# Altium PCB ZX_UNO_0_15.PcbDoc
Units mil, origin at the board's own origin, x right, y up, seen from the top; angles counter-clockwise.
Board outline 3395.53 x 2214.53 mil, 2 copper layers (Top Layer, Bottom Layer); 98 components, 140 nets, 511 pads, 131 vias.
Unrouted connection lines stored in the file: 2.
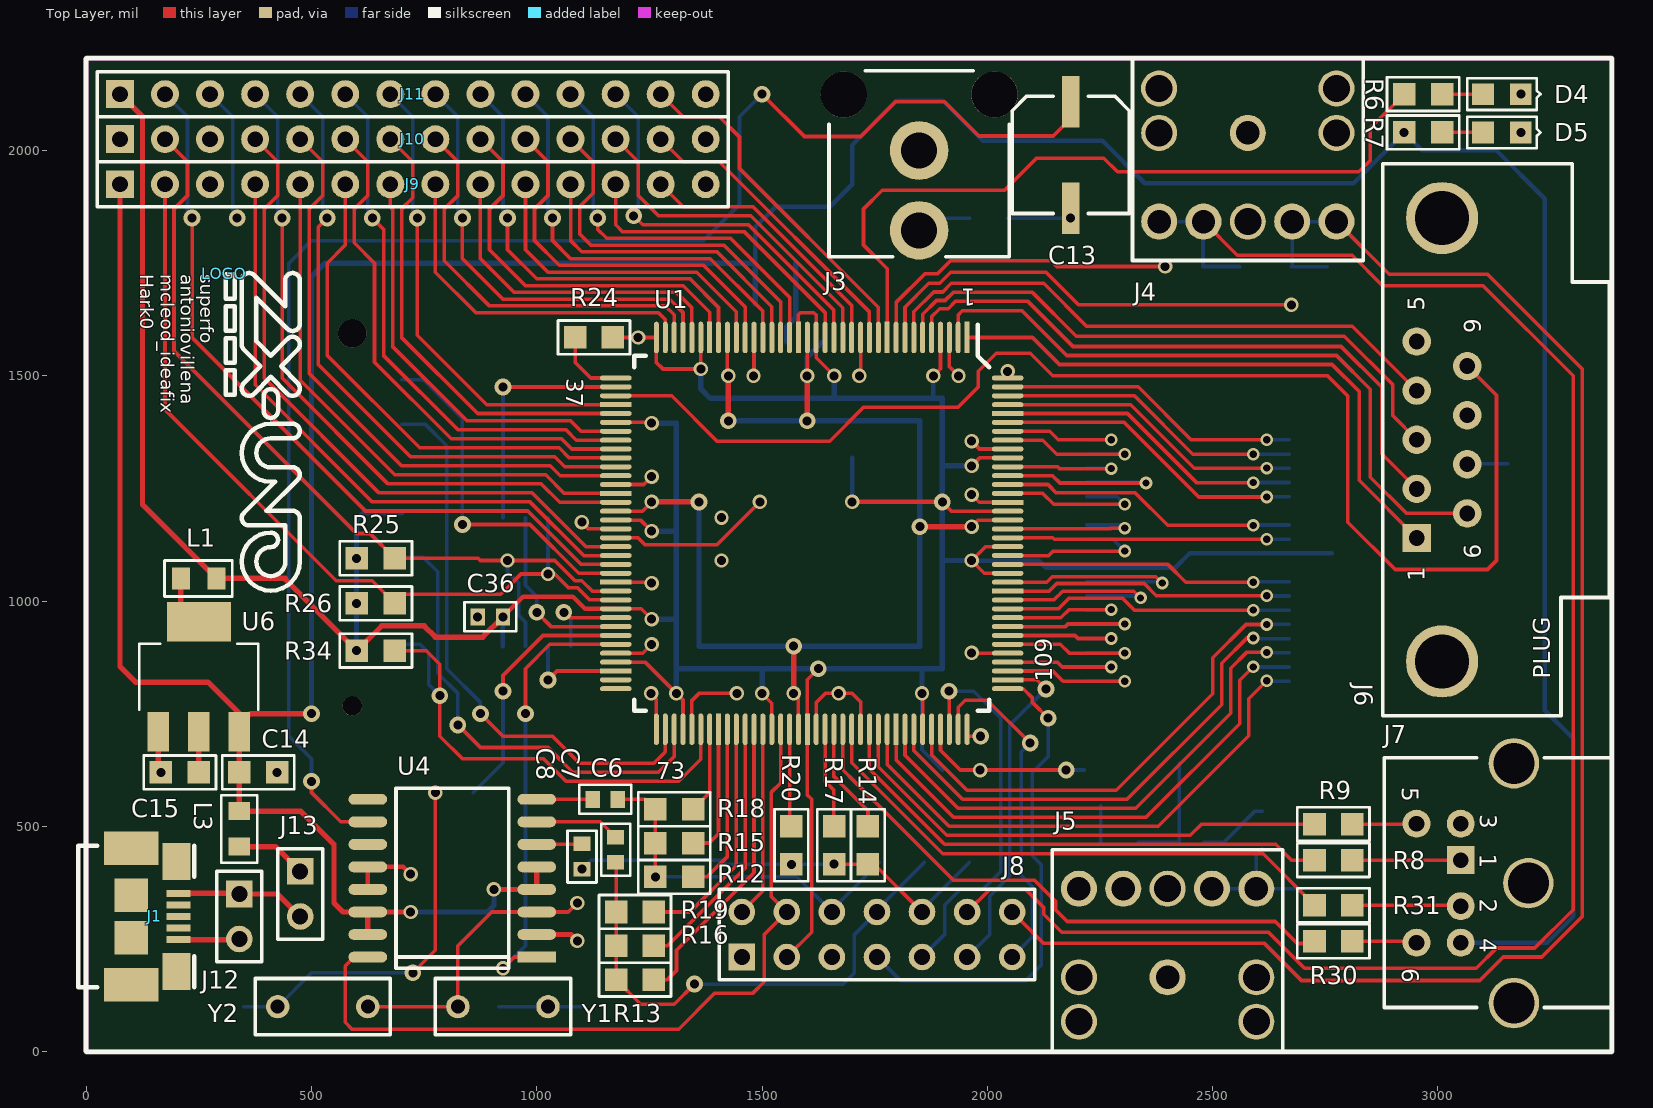
[diagram p0: Top Layer view]
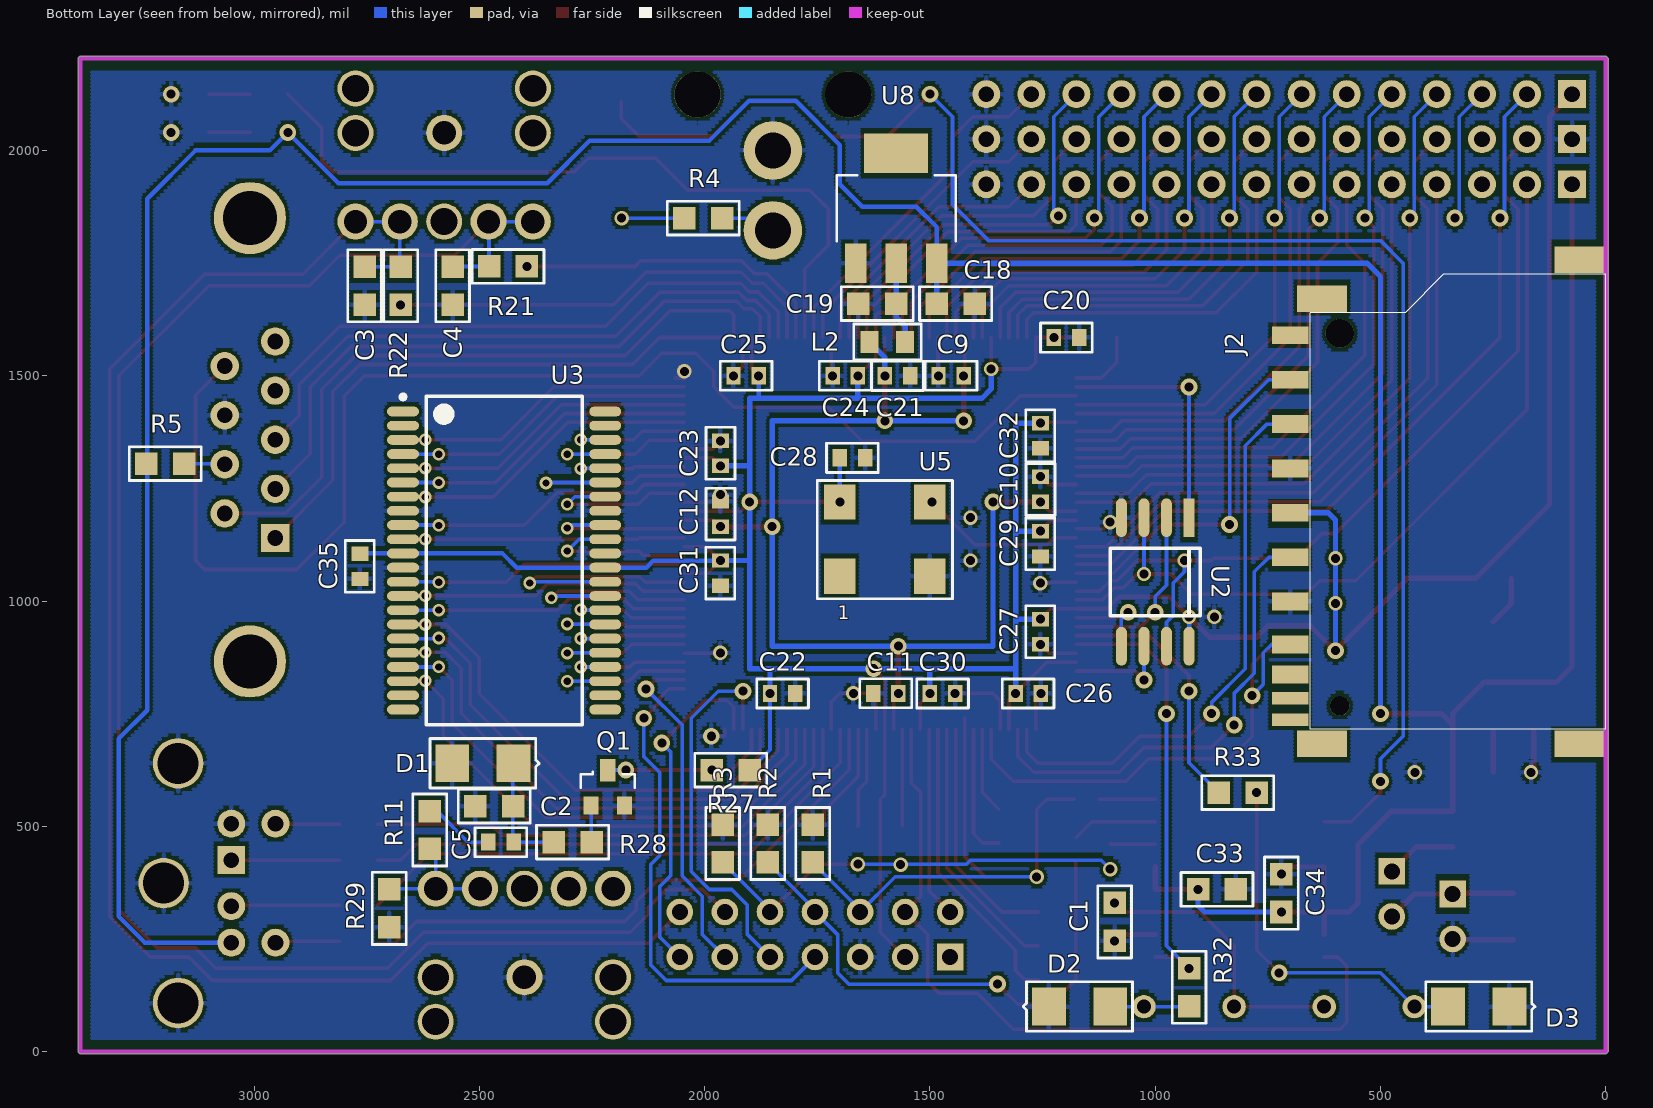
[diagram p1: Bottom Layer view, seen from below]

## Layer stack, top to bottom
Top Solder: solder mask 0.4, Solder Resist, Dk 3.5
Top Layer: signal copper 1.4
Dielectric1: core 12.6, FR-4, Dk 4.8
Bottom Layer: signal copper 1.4
Bottom Solder: solder mask 0.4, Solder Resist, Dk 3.5

## Board outline
-5,0 0,-5 3385.53,-5 3390.53,0 3390.53,2204.53 3385.53,2209.53 0,2209.53 -5,2204.53

## Design rules (kind name [scope] priority, off if disabled: settings)
Clearance [All] p1: gap=7
HoleSize [All] p1: absolutevalues=TRUE maxlimit=200 minlimit=1 maxpercent=80.000 minpercent=20.000
MinimumSolderMaskSliver [All] p1: minsoldermaskwidth=8
PlaneConnect [All] p1: planeconnectstyle=Relief reliefexpansion=25 reliefentries=4 reliefconductorwidth=12 reliefairgap=10
PolygonConnect [All] p1: connectstyle=Relief reliefconductorwidth=10 reliefentries=4 polygonreliefangle="90 Angle" airgapwidth=10
RoutingLayers RoutingLayers_1 [All] p1: top layer_v5=TRUE bottom layer_v5=TRUE
RoutingLayers [All] p2: top layer_v5=TRUE bottom layer_v5=TRUE
RoutingVias [All] p1: holewidth=20 width=37 viastyle="Through Hole" minholewidth=16 minwidth=28 maxholewidth=28 maxwidth=50
SilkToSilkClearance [All] p1: silktosilkclearance=5
SilkToSolderMaskClearance SilkscreenOverComponentPads [IsPad] p1: minsilkscreentomaskgap=5 clearancetoexposedcopper=TRUE
SolderMaskExpansion [All] p1: expansion=0
UnpouredPolygon [All] p1: allowunpoured=FALSE
Width Net_Width_1 [InNet('1.2V') Or InNet('2.5V') Or InNet('3.3V') Or InNet('5V')] p1: maxlimit=12 minlimit=8 preferedwidth=10
Width [All] p2: maxlimit=12 minlimit=8 preferedwidth=10
23 further rules are at their usual default settings.

## Components (designator, comment, footprint, x,y, rotation, side; value= is the part's Value field where it differs from the comment)
C1 "10pF" SM/C_0805#1 1090,330 r270 bottom
C2 "10nF" SM/C_0805#2 2509,545 r0 bottom
C3 "10nF" SM/C_0805#2 2754.48,1657.57 r270 bottom
C4 "10nF" SM/C_0805#2 2559.48,1657.57 r270 bottom
C5 "100nF" SM/C_0603 2480,465 r180 bottom
C6 "100nF" SM/C_0603 1180,560 r180 top
C7 "100nF" SM/C_0603 1175,420 r90 top
C8 "100nF" SM/C_0603 1100,405 r90 top
C9 "100nF" SM/C_0603 1425,1500 r0 bottom
C10 "100nF" SM/C_0603 1255,1220 r90 bottom
C11 "100nF" SM/C_0603 1570,795 r0 bottom
C12 "100nF" SM/C_0603 1965,1165 r90 bottom
C13 "220uF" CAP/D6.6MM 2185,1990 r90 top
C14 "4.7uF" SM/C_0805#1 340,620 r0 top
C15 "4.7uF" SM/C_0805#1 250,620 r180 top
C18 "4.7uF" SM/C_0805#2 1485,1660 r0 bottom
C19 "4.7uF" SM/C_0805#2 1575,1660 r180 bottom
C20 "100nF" SM/C_0603 1225,1585 r180 bottom
C21 "100nF" SM/C_0603 1600,1500 r180 bottom
C22 "100nF" SM/C_0603 1855,795 r180 bottom
C23 "100nF" SM/C_0603 1965,1300 r90 bottom
C24 "100nF" SM/C_0603 1660,1500 r0 bottom
C25 "100nF" SM/C_0603 1880,1500 r0 bottom
C26 "100nF" SM/C_0603 1310,795 r180 bottom
C27 "100nF" SM/C_0603 1255,960 r270 bottom
C28 "100nF" SM/C_0603 1700,1318 r180 bottom
C29 "100nF" SM/C_0603 1255,1155 r270 bottom
C30 "100nF" SM/C_0603 1500,795 r180 bottom
C31 "100nF" SM/C_0603 1965,1090 r270 bottom
C32 "100nF" SM/C_0603 1255,1395 r270 bottom
C33 "10uF" SM/C_0805#1 905,360 r180 bottom
C34 "10uF" SM/C_0805#1 720,310 r90 bottom
C35 "100nF" SM/C_0603 2765,1105 r270 bottom
C36 "100nF" SM/C_0603 925,965 r180 top
D1 "1N4148" SM/DO213AA_21 2560,640 r0 bottom
D2 "1N4148" SM/DO213AA_21 1100,100 r180 bottom
D3 "1N4148" SM/DO213AA_21 350,100 r0 bottom
D4 "LED" SM/D_0805_21 3100,2125 r180 top
D5 "LED" SM/D_0805_21 3100,2040 r180 top
J1 "microUSB" "MICRO USB 609-4613-1-ND" 100,300 r270 top locked
J2 "SD" "SD 101-00708-64-ND" 590.5,1220.37 r270 bottom locked
J3 "RCA" "RCA JACK RCJ-04X - DUPLICATE" 1848.52,2000 r0 top locked
J4 "Audio" "AUDIO JACK PSG01538 - duplicate" 2578,2039 r0 top locked
J5 "EAR" "AUDIO JACK PSG01538 - duplicate" 2400,165 r180 top
J6 "JOYSTICK" "DSUB/RP.318/TM/9 - DUPLICATE" 2953,1140 r90 top locked
J7 "KEYBOARD" DINC/MIN_TM/6 3385.53,373.98 r270 top locked
J8 "Header 7X2" HDR2X7 1455,210 r0 top
J9 "HEADER 14" BLKCON.100/VH/TM1SQ/W.100/14 75,1925 r0 top locked
J10 "HEADER 14" BLKCON.100/VH/TM1SQ/W.100/14 75,2025 r0 top locked
J11 "HEADER 14" BLKCON.100/VH/TM1SQ/W.100/14 75,2125 r0 top locked
J12 "Header 2" HDR1X2 340,350 r270 top
J13 "Header 2" HDR1X2 475,400 r270 top
L1 "Inductor" SM/L_0805 210,1050 r0 top
L2 "Inductor" SM/L_0805 1555,1575 r0 bottom
L3 "Inductor" SM/L_0805 340,455 r90 top
LOGO "Comment" ZX-UNO 307,1726.4 r270 top locked
Q1 "BC846" SM/SOT23_231 2215,625 r0 bottom
R1 "75" SM/R_0805#1 1760,420 r270 bottom
R2 "75" SM/R_0805#1 1860,420 r270 bottom
R3 "75" SM/R_0805#2 1960,420 r90 bottom
R4 "75" SM/R_0805#1 2045,1850 r0 bottom
R5 "300" SM/R_0805#1 3155,1305 r180 bottom
R6 "300" SM/R_0805#2 2925,2125 r0 top
R7 "300" SM/R_0805#2 2925,2040 r0 top
R8 "270" SM/R_0805#2 2810,425 r180 top
R9 "270" SM/R_0805#2 2810,505 r180 top
R11 "470" SM/R_0805#1 2610,450 r270 bottom
R12 "470" SM/R_0805#2 1347,388 r180 top
R13 "470" SM/R_0805#2 1260,160 r180 top
R14 "470" SM/R_0805#2 1735,500 r270 top
R15 "1K" SM/R_0805#2 1347,463 r180 top
R16 "1K" SM/R_0805#2 1260,235 r180 top
R17 "1K" SM/R_0805#2 1660,500 r270 top
R18 "2K" SM/R_0805#2 1347,538 r180 top
R19 "2K" SM/R_0805#2 1260,310 r180 top
R20 "2K" SM/R_0805#2 1565,500 r270 top
R21 "3K9" SM/R_0805#2 2394.48,1742.57 r0 bottom
R22 "3K9" SM/R_0805#2 2674.48,1657.57 r90 bottom
R24 "4K7" SM/R_0805#2 1085,1585 r0 top
R25 "2K" SM/R_0805#2 685,1095 r180 top
R26 "2K" SM/R_0805#2 685,995 r180 top
R27 "10K" SM/R_0805#2 1900,625 r0 bottom
R28 "10K" SM/R_0805#1 2335,465 r0 bottom
R29 "10K" SM/R_0805#1 2700,360 r90 bottom
R30 "270" SM/R_0805#2 2810,245 r180 top
R31 "270" SM/R_0805#2 2810,325 r180 top
R32 "10K" SM/R_0805#2 925,185 r270 bottom
R33 "10K" SM/R_0805#2 775,575 r0 bottom
R34 "10K" SM/R_0805#2 685,890 r180 top
U1 "XC6SLX9/TFP144_1" QUAD.50M/144/WG22.60 1955,1585 r180 top locked
U2 "W25X40BV/W25Q80BV" SOJ.050/8/WB.300/L.200 925,1185 r180 bottom
U3 "IS61WV20488BLL-10TI" SOP80P1176-44M 2445,1090 r180 bottom
U4 "AD724" SOJ.050/16/WB.400/L.400 1000,210 r90 top
U5 "50MHz" SM/OSC 1700,1055 r0 bottom
U6 "ZLDO1117G33TA" SM/SOT223#1 160,710 r0 top
U8 "ZLDO1117G12TA" SM/SOT223#2 1665,1750 r0 bottom
Y1 "3.58M" RAD/.300X.125/LS.200/.031 825,100 r0 top
Y2 "4.43M" RAD/.300X.125/LS.200/.031 625,100 r180 top

## Footprints (in the part's own frame and the unit in brackets; to place one, negate y for a bottom-side part, rotate by r counter-clockwise, add the part's x,y. Pads: shape width x height; smd on the part's side, far side on the other; paste and mask are expansions set on the pad)
"AUDIO JACK PSG01538 - duplicate" [mil]
  round 80 hole 52: 1(0,0) 2(196.83,-196.83) 3(98.42,-196.83) 4(-98.42,-196.83) 5(-196.83,-196.83)
  round 80 hole 60 unplated: 6(-196.83,0) 7(196.83,0) 8(0,-196.83) 9(-196.85,98.43) 10(196.85,98.43)
  silkscreen extent -256,-283 256,165
BLKCON.100/VH/TM1SQ/W.100/14 [mil]
  rect 62x62 / inner round 60 / far side rect 62x62 hole 35: 1(0,0)
  round 62 / inner round 60 / far side round 62 hole 35: 2(100,0) 3(200,0) 4(300,0) 5(400,0) 6(500,0) 7(600,0) 8(700,0) 9(800,0) 11(1000,0) 12(1100,0) 13(1200,0) 14(1300,0)
  round 62 hole 35: 10(900,0)
  silkscreen extent -50,-50 1350,50
CAP/D6.6MM [mm]
  rect 2.9x1 smd: 1(3,0) 2(-3,0)
  silkscreen extent -3.3,-3.3 3.3,3.3
DINC/MIN_TM/6 [mil]
  rect 62x62 / inner round 60 / far side rect 62x62 hole 35: 1(-51,-335)
  round 62 / inner round 60 / far side round 62 hole 35: 2(51,-335) 3(-132,-335) 4(132,-335) 5(-132,-433) 6(132,-433)
  round 112 / inner round 60 / far side round 112 hole 91: M1(-266,-217) M2(0,-185) M3(266,-217)
  silkscreen extent -278,-505 276,0
"DSUB/RP.318/TM/9 - DUPLICATE" [mil]
  rect 63x63 hole 35: 1(0,0)
  round 63 hole 35: 2(109,0) 3(218,0) 4(327,0) 5(436,0) 6(54.5,-112) 7(163.5,-112) 8(272.5,-112) 9(381.5,-112)
  round 160 hole 120: Hole49(-274,-56) Hole50(710,-56)
  silkscreen extent -394,-427 830,76
HDR1X2 [mm] "Connector; Header; 2 Position"
  rect 1.5x1.5 hole 0.9: 1(0,0)
  round 1.5 hole 0.9: 2(2.54,0)
  silkscreen extent -1.27,-1.27 3.81,1.27
HDR2X7 [mm] "Connector; Header; 7x2 Position"
  rect 1.5x1.5 hole 0.9: 1(0,0)
  round 1.5 hole 0.9: 2(0,2.54) 3(2.54,0) 4(2.54,2.54) 5(5.08,0) 6(5.08,2.54) 7(7.62,0) 8(7.62,2.54) 9(10.16,0) 10(10.16,2.54) 11(12.7,0) 12(12.7,2.54) 13(15.24,0) 14(15.24,2.54)
  silkscreen extent -1.27,-1.27 16.51,3.81
"MICRO USB 609-4613-1-ND" [mil]
  rect 15.73x53.13 smd: 1(-51.18,105.32) 2(-25.58,105.32) 3(0,105.32) 4(25.58,105.32) 5(51.18,105.32)
  rect 74.8x120 smd: 6(-151.57,0) 9(151.57,0)
  rect 74.8x74.8 smd: 7(-47.25,0) 8(47.25,0)
  rect 82.67x63 smd: 10(-122.05,100.4) 11(122.05,100.4)
  silkscreen extent -157,-118 157,140
QUAD.50M/144/WG22.60 [mil]
  rect 11x70 smd: 1(0,0) 10(177.3,0) 20(374.3,0) 30(571.3,0) 80(551.6,869.5) 90(354.6,869.5) 100(157.6,869.5)
  oval 11x70 smd: 2(19.7,0) 3(39.4,0) 4(59.1,0) 5(78.8,0) 6(98.5,0) 7(118.2,0) 8(137.9,0) 9(157.6,0) 11(197,0) 12(216.7,0) 13(236.4,0) 14(256.1,0) 15(275.8,0) 16(295.5,0) 17(315.2,0) 18(334.9,0) 19(354.6,0) 21(394,0) 22(413.7,0) 23(433.4,0) 24(453.1,0) 25(472.8,0) 26(492.5,0) 27(512.2,0) 28(531.9,0) 29(551.6,0) 31(591,0) 32(610.7,0) 33(630.4,0) 34(650.1,0) 35(669.8,0) 36(689.5,0) 73(689.5,869.5) 74(669.8,869.5) 75(650.1,869.5) 76(630.4,869.5) 77(610.7,869.5) 78(591,869.5) 79(571.3,869.5) 81(531.9,869.5) 82(512.2,869.5) 83(492.5,869.5) 84(472.8,869.5) 85(453.1,869.5) 86(433.4,869.5) 87(413.7,869.5) 88(394,869.5) 89(374.3,869.5) 91(334.9,869.5) 92(315.2,869.5) 93(295.5,869.5) 94(275.8,869.5) 95(256.1,869.5) 96(236.4,869.5) 97(216.7,869.5) 98(197,869.5) 99(177.3,869.5) 101(137.9,869.5) 102(118.2,869.5) 103(98.5,869.5) 104(78.8,869.5) 105(59.1,869.5) 106(39.4,869.5) 107(19.7,869.5) 108(0,869.5)
  oval 70x11 smd: 37(779.5,90) 38(779.5,109.7) 39(779.5,129.4) 41(779.5,168.8) 42(779.5,188.5) 43(779.5,208.2) 44(779.5,227.9) 45(779.5,247.6) 46(779.5,267.3) 47(779.5,287) 48(779.5,306.7) 49(779.5,326.4) 51(779.5,365.8) 52(779.5,385.5) 53(779.5,405.2) 54(779.5,424.9) 55(779.5,444.6) 56(779.5,464.3) 57(779.5,484) 58(779.5,503.7) 59(779.5,523.4) 61(779.5,562.8) 62(779.5,582.5) 63(779.5,602.2) 64(779.5,621.9) 65(779.5,641.6) 66(779.5,661.3) 67(779.5,681) 68(779.5,700.7) 69(779.5,720.4) 71(779.5,759.8) 72(779.5,779.5) 109(-90,779.5) 111(-90,740.1) 112(-90,720.4) 113(-90,700.7) 114(-90,681) 115(-90,661.3) 116(-90,641.6) 117(-90,621.9) 118(-90,602.2) 119(-90,582.5) 121(-90,543.1) 122(-90,523.4) 123(-90,503.7) 124(-90,484) 125(-90,464.3) 126(-90,444.6) 127(-90,424.9) 128(-90,405.2) 129(-90,385.5) 131(-90,346.1) 132(-90,326.4) 133(-90,306.7) 134(-90,287) 135(-90,267.3) 136(-90,247.6) 137(-90,227.9) 138(-90,208.2) 139(-90,188.5) 141(-90,149.1) 142(-90,129.4) 143(-90,109.7) 144(-90,90)
  rect 70x11 smd: 40(779.5,149.1) 50(779.5,346.1) 60(779.5,543.1) 70(779.5,740.1) 110(-90,759.8) 120(-90,562.8) 130(-90,365.8) 140(-90,168.8)
  silkscreen extent -49,-28 738,829
RAD/.300X.125/LS.200/.031 [mil]
  round 52 hole 31: 1(0,0) 2(200,0)
  silkscreen extent -50,-62 250,62
"RCA JACK RCJ-04X - DUPLICATE" [mm]
  round 2.6 hole 2.6 unplated: 0(-4.25,3.15) 0(4.25,3.15)
  round 3.302 hole 2.032: 1(0,-4.5) 2(0,0)
  silkscreen extent -5.08,-6 5.08,4.49
"SD 101-00708-64-ND" [mil]
  rect 39.37x80.7 smd: 1(-270.87,-110.23) 2(-172.43,-110.23) 3(-74,-110.23) 4(24.42,-110.23) 5(122.83,-110.23) 6(221.27,-110.23) 7(316.53,-110.23) 8(383.47,-110.23) 9(-369.28,-110.23)
  rect 27.57x80.7 smd: 10(436.22,-110.23) 11(483.47,-110.23)
  round 43.3 / inner round 60 / far side round 43.3 hole 43.3 mask+7.87: M1(452.75,0)
  round 63 / inner round 60 / far side round 63 hole 63 mask+7.87: M2(-374,0)
  rect 59.03x110.23 smd: P1(537.4,-39.37) P2(-450.78,-39.37) P3(537.4,531.5) P4(-537.4,531.5)
  silkscreen extent -505,-65 505,590
SM/C_0603 [mil]
  rect 32x38 smd: 1(0,0) 2(56,0)
  silkscreen extent -30,-33 86,32
SM/C_0805#1 [mil]
  rect 50x50 smd: 1(0,0) 2(84,0)
  silkscreen extent -38,-38 122,38
SM/C_0805#2 [mil]
  rect 50x50 smd: 1(0,0) 2(-84,0)
  silkscreen extent -122,-38 38,38
SM/D_0805_21 [mil]
  rect 48x48 smd: 1(0,0) 2(-84,0)
  silkscreen extent -128,-35 35,35
SM/DO213AA_21 [mil]
  rect 75x84 smd: 1(0,0) 2(-136,0)
  silkscreen extent -193,-55 50,55
SM/L_0805 [mil]
  rect 40x48 smd: 1(0,0) 2(79,0)
  silkscreen extent -36,-40 114,40
SM/OSC [mil]
  rect 70x78 smd: 1(0,0) 2(-200,0) 3(-200,-165) 4(0,-165)
  silkscreen extent -250,-212 50,50
SM/R_0805#1 [mil]
  rect 50x50 smd: 1(0,0) 2(-84,0)
  silkscreen extent -122,-38 38,38
SM/R_0805#2 [mil]
  rect 50x50 smd: 1(0,0) 2(84,0)
  silkscreen extent -38,-38 122,38
SM/SOT23_231 [mil]
  rect 34x50 smd: 1(0,0)
  rect 34x40 smd: 2(37,79) 3(-37,79)
  silkscreen extent -60,4 60,39
SM/SOT223#1 [mil]
  rect 48x88 smd: 1(0,0) 2(90,0) 3(180,0)
  rect 142x88 smd: 4(90,244)
  silkscreen extent -42,49 222,195
SM/SOT223#2 [mil]
  rect 48x88 smd: 1(0,0) 2(-90,0) 3(-180,0)
  rect 142x88 smd: 4(-90,-244)
  silkscreen extent -222,-195 42,-49
SOJ.050/8/WB.300/L.200 [mil]
  rect 24x86 smd: 1(0,0)
  oval 24x86 smd: 2(-50,0) 3(-100,0) 4(-150,0) 5(-150,-285) 6(-100,-285) 7(-50,-285) 8(0,-285)
  silkscreen extent -175,-218 25,-67
SOJ.050/16/WB.400/L.400 [mil]
  rect 24x86 smd: 1(0,0)
  oval 24x86 smd: 2(50,0) 3(100,0) 4(150,0) 5(200,0) 6(250,0) 7(300,0) 8(350,0) 9(350,375) 10(300,375) 11(250,375) 12(200,375) 13(150,375) 14(100,375) 15(50,375) 16(0,375)
  silkscreen extent -25,62 375,312
SOP80P1176-44M [mm] "SOP, 44-Leads, Body 18.4x10.16mm, Pitch 0.8mm, IPC Low Density"
  oval 1.8x0.55 smd: 1(-5.7,8.4) 2(-5.7,7.6) 3(-5.7,6.8) 4(-5.7,6) 5(-5.7,5.2) 6(-5.7,4.4) 7(-5.7,3.6) 8(-5.7,2.8) 9(-5.7,2) 10(-5.7,1.2) 11(-5.7,0.4) 12(-5.7,-0.4) 13(-5.7,-1.2) 14(-5.7,-2) 15(-5.7,-2.8) 16(-5.7,-3.6) 17(-5.7,-4.4) 18(-5.7,-5.2) 19(-5.7,-6) 20(-5.7,-6.8) 21(-5.7,-7.6) 22(-5.7,-8.4) 23(5.7,-8.4) 24(5.7,-7.6) 25(5.7,-6.8) 26(5.7,-6) 27(5.7,-5.2) 28(5.7,-4.4) 29(5.7,-3.6) 30(5.7,-2.8) 31(5.7,-2) 32(5.7,-1.2) 33(5.7,-0.4) 34(5.7,0.4) 35(5.7,1.2) 36(5.7,2) 37(5.7,2.8) 38(5.7,3.6) 39(5.7,4.4) 40(5.7,5.2) 41(5.7,6) 42(5.7,6.8) 43(5.7,7.6) 44(5.7,8.4)
  silkscreen extent -5.82,-9.25 4.4,9.35, body extent -5.13,-9.26 5.13,9.26, height 1.2
ZX-UNO [mil]
  silkscreen extent -2,3 703,167

## Part data
C1 C2 C3 C4 C5 C6 C7 C8: library part "CAP NP_Dup1"
C9 C10 C11 C12 C14 C15 C18 C19 C20 C21 C22 C23 C24 C25 C26 C27 C28 C29 C30 C31 C32 C33 C34 C35 C36: library part "CAP NP"
C13: library part CAP
D1 D2 D3: library part DIODE
J1: library part CON2_0
J2: library part CON7
J3: library part "RCA JACK"
J4 J5: library part "PHONEJACK STEREO SW_0"
J6: library part "CONNECTOR DB9"
J7: library part M-DIN_0
J8: "Header, 7-Pin, Dual row"
J12 J13: "Header, 2-Pin"
Q1: library part BC547
R1 R2 R3 R4 R5 R6 R7 R8 R9 R11 R12 R13 R14 R15 R16 R17 R18 R19 R20 R21 R22 R24 R25 R26 R27 R28 R29 R30 R31 R32 R33 R34: library part R
U2: library part AT45DB011/SOIC_3
U5: library part CS-403/TO_0
U6 U8: library part REGULATOR-1_0
Y1 Y2: library part CRYSTAL

## Via types
v1: diameter 32, hole 20, Top Layer to Bottom Layer, 58 vias
v2: diameter 37, hole 20, Top Layer to Bottom Layer, 43 vias
v3: diameter 28, hole 16, Top Layer to Bottom Layer, 30 vias

## Nets (pads, with @x,y where several pads share a name; then routed paths per layer and width w, separated by ;. In a path a pad name is that pad's centre, name@x,y a point inside that pad or via, vN(x,y) a via of type N, cw(c..) or ccw(c..) an arc to the next point about the centre after c; other vN are vias at no path point)
1.2V: C9.1 C10.1 C11.1 C12.1 C21.1 L2.2 U1.19 U1.28 U1.52 U1.89 U1.128 | length 2774.8
  Top Layer w8: U1.52 1234.5,1199.5 v1(1255,1220) ; v1@1423.1,1501.9 U1.28 ; v1(1570,795) 1580.7,784.3 U1.89 ; v1@1600.4,1500.4 U1.19 ; v1(1965,1165) 1979.8,1179.8 U1.128
  Top Layer w12: v1(1255,1220) v2(1360,1220) ; v2(1425,1400) v1(1425,1500) ; v1(1570,795) v2(1570,900) ; v2(1600,1400) v1(1600,1500) ; v2(1850,1165) v1(1965,1165)
  Bottom Layer w12: v2(1360,1220) 1360,900 v2(1570,900) 1850,900 v2(1850,1165) 1850,1400 v2(1600,1400) v2(1425,1400) ; v1(1600,1500) 1600,1541 L2.2
3.3V: C20.1 C22.1 C23.1 C24.1 C25.1 C26.1 C27.1 C28.1 C29.1 C30.1 C31.1 C32.1 C35.1 C36.1 J2.4 J8.3 J11.1 L1.2 R24.2 R25.2 R26.2 R27.1 R34.2 U1.4 U1.18 U1.20 U1.31 U1.36 U1.42 U1.53 U1.63 U1.69 U1.76 U1.86 U1.90 U1.103 U1.122 U1.125 U1.129 U1.135 U2.8 U3.11 U3.33 U5.4 | length 9454.7
  Top Layer w8: R24.2 v1(1225,1585) U1.36 1265.5,1529.5 1280,1515 v1(1364,1515) U1.31 ; U1.69 1240.4,864.6 v1(1310,795) 1324.6,780.4 U1.76 ; U1.63 1232.2,982.8 v1(1255,960) ; U1.53 1230.2,1179.8 v1(1255,1155) ; U1.42 v1@1253.5,1396.5 ; v1(1500,795) 1521.6,773.4 U1.86 ; J8.3 1610,265 1610,560 1600.4,569.6 U1.90 1600.4,825.4 v2(1625,850) ; U1.20 1580.7,1635.7 1585,1640 1615,1640 1620.1,1634.9 U1.18 1620.1,1539.9 v1(1660,1500) ; v1(1855,795) 1856.5,793.5 U1.103 ; v1(1880,1500) 1895.9,1515.9 U1.4 ; v2(1900,1220) 1920.5,1199.5 U1.129 ; v1(1965,1300) 1982.7,1317.7 U1.135 ; U1.122 1993.4,1061.6 v1(1965,1090) 1995.7,1120.7 U1.125
  Top Layer w10: v1(925,965) 970,1010 1080,1010 1107.2,982.8 U1.63 ; v1(1700,1220) v2(1900,1220)
  Top Layer w12: J11.1 125,2075 125,1214 L1.2 440,1050 v2(600,890) ; L1.2@291,1050.4 442,1050.4 ; R34.2 656,945 750,945 775,920 880,920 v1(925,965)
  Bottom Layer w8: v1(1855,795) 1855,670 R27.1
  Bottom Layer w10: U2.8 v1(925,965) ; v1(1700,1220) C28.1 ; 1880,1450 v1(1880,1500) ; v1(1965,1090) 2114,1090 2129.75,1074.25 U3.33 2417.25,1074.25 2448.75,1105.75 U3.11 C35.1@2764.25,1105.75
  Bottom Layer w12: v2(600,890) v1(600,995) 600,1180 615.95,1195.95 J2.4 ; v1(1255,960) 1310,960 ; v1(1255,1155) 1310,1155 ; v1(1255,1395) 1310,1395 1310,1155 ; v1(1310,795) 1310,850 ; v1(1364,1515) 1364,1471 1385,1450 1880,1450 1900,1450 1900,1300 ; v1(1500,795) 1500,850 ; 1660,1451 v1(1660,1500) ; v1(1855,795) 1855,850 ; v1(1965,1090) 1900,1090 ; C23.1@1970,1300 1970,1295 1965,1290 1955,1300 1900,1300 ; 1310,850 1310,960 ; 1310,850 1500,850 ; 1310,960 1310,1155 ; 1500,850 v2(1625,850) 1855,850 ; 1855,850 1900,850 1900,1090 ; 1900,1090 v2(1900,1220) 1900,1300
  other v1: 600,1095
5V: C14.1 C18.1 C33.1 C34.1 J7.4 J9.1 L3.2 R5.2 R7.1 U4.4 U4.5 U4.14 U4.15 U6.3 U8.3 | length 8870.1
  Top Layer w12: J9.1 75,855 110,820 270,820 340,750 U6.3@340,725 ; v2(500,750) 365,750 U6.3@340,725 ; U4.15 U4.14 ; v1(720,310) U4.14 ; v1(905,360) U4.4 U4.5 ; U6.3@340,725 U6.3 C14.1 L3.2 476,534 550,460 550,330 570,310 U4.14
  Bottom Layer w10: U8.3 1485,1830 1530,1875 1650,1875 1700,1925 1700,2012 1798,2110 1901.37,2110 1989.37,2022 2255.05,2022 2349.48,1927.57 2812.57,1927.57 v2(2925,2040) 2965,2000 3130,2000 3237,1893 3237,758 3300,695 3300,300 3241.98,241.98 J7.4
  Bottom Layer w12: v2(500,750) 500,1720 530,1750 U8.3 C18.1 ; v1(720,310) 891,310 905,324 v1(905,360) ; J7.4@3048.02,241.98 J7.4
B: C6.1 J8.6 R1.1 R12.2 R15.2 R18.2 | length 819.9
  Top Layer w8: C6.1 1241,560 R18.2 R15.2 v1(1263,388)
  Bottom Layer w8: v1(1263,388) 1577,388 J8.6 1655,315 R1.1
B0: R18.1 U1.79 | length 192.5
  Top Layer w8: R18.1 1383.7,575.3 U1.79
B1: R15.1 U1.80 | length 296.9
  Top Layer w8: R15.1 1383,463 1403.4,483.4 U1.80
B2: R12.1 U1.81 | length 402.2
  Top Layer w8: R12.1 1378,388 1423.1,433.1 U1.81 U1.81@1423.1,740.5
CLK: U1.55 U5.3 | length 365.2
  Top Layer w8: U1.55 1224.6,1140.4 1240,1125 1400,1125 v1(1495,1220)
CSYNC: J8.4 U1.87 U4.16 | length 1767.5
  Top Layer w8: U4.16 595,210 575,190 575,65 590,50 1315,50 1395,130 1480,130 1505,155 1505,260 J8.4 1520,345 1520,575 1541.3,596.3 U1.87
EAR: Q1.1 R27.2 U1.105 | length 383.8
  Top Layer w8: U1.105 1895.9,669.1 1940,625 v1(1984,625) v2(2175,625)
  Bottom Layer w8: v2(2175,625) Q1.1
EXT1(WP): J9.2 R26.1 U1.62 U2.3 | length 1854.4
  Top Layer w8: J9.2 175,1425 555,1045 635,1045 R26.1 705,1015 920,1015 965,1060 v1(1025,1060) 1040,1060 1070,1030 1090,1030 1117.5,1002.5 U1.62
  Bottom Layer w8: v1(1025,1060) U2.3
EXT2(HOLD): J10.2 R25.1 U1.61 U2.7 | length 1910.9
  Top Layer w8: J10.2 225,1975 225,1900 195,1870 195,1555 600,1150 630,1150 R25.1 870,1095 875,1090 v1(935,1090) 1040,1090 1085,1045 1100,1045 1122.8,1022.2 U1.61
  Bottom Layer w8: v1(935,1090) 935,1065 960,1040 960,967.94 975,952.94 U2.7
EXT3: J11.2 U1.58 | length 1714
  Top Layer w8: v2(235,1850) 235,1585 620,1200 980,1200 1098.7,1081.3 U1.58
  Bottom Layer w8: J11.2 225,2075 225,1860 v2(235,1850)
EXT4(NC): J9.3
EXT5(NC): J10.3
EXT6(NC): J11.3 | length 299.9
  Bottom Layer w8: J11.3 325,2075 325,1860 v2(335,1850)
EXT7: J9.4 U1.57 | length 1402.5
  Top Layer w8: J9.4 375,1480 635,1220 985,1220 1104,1101 U1.57
EXT8: J10.4 U1.56 | length 1498.7
  Top Layer w8: J10.4 425,1975 425,1900 395,1870 395,1495 650,1240 990,1240 1109.3,1120.7 U1.56
EXT9: J11.4 U1.51 | length 1509.6
  Top Layer w8: v2(435,1850) 435,1495 670,1260 1010,1260 1050.8,1219.2 U1.51
  Bottom Layer w8: J11.4 425,2075 425,1860 v2(435,1850)
EXT10: J9.5 U1.50 | length 1239.5
  Top Layer w8: J9.5 475,1490 685,1280 1020,1280 1061.1,1238.9 U1.50
EXT11: J10.5 U1.48 | length 1327.4
  Top Layer w8: J10.5 525,1975 525,1900 495,1870 495,1505 700,1300 1030,1300 1052,1278 U1.48@1175.2,1278
EXT12: J11.5 U1.47 | length 1387.7
  Top Layer w8: v2(535,1850) 515,1830 515,1525 720,1320 1040,1320 1062,1298 U1.47
  Bottom Layer w8: J11.5 525,2075 525,1860 v2(535,1850)
EXT13: J9.6 U1.46 | length 1131.2
  Top Layer w8: J9.6 575,1790 535,1750 535,1545 740,1340 1050,1340 1072.3,1317.7 U1.46
EXT14: J10.6 U1.45 | length 1162.1
  Top Layer w8: J10.6 625,1975 625,1900 595,1870 595,1795 640,1750 640,1530 810,1360 1055,1360 1077.6,1337.4 U1.45
EXT15: J11.6 U1.44 | length 1208.5
  Top Layer w8: v2(635,1850) 660,1825 660,1545 825,1380 1065,1380 1087.9,1357.1 U1.44
  Bottom Layer w8: J11.6 625,2075 625,1860 v2(635,1850)
EXT16: J9.7 U1.43 | length 935.5
  Top Layer w8: J9.7 675,1875 680,1870 680,1565 845,1400 1075,1400 1098.2,1376.8 U1.43
EXT17: J10.7 U1.41 | length 1016.5
  Top Layer w8: J10.7 725,1975 725,1895 700,1870 700,1585 868.8,1416.2 U1.41
EXT18: J11.7 U1.40 | length 1064.2
  Top Layer w8: v2(735,1850) 735,1590 889.1,1435.9 U1.40
  Bottom Layer w8: J11.7 725,2075 725,1860 v2(735,1850)
EXT19: J9.8 U1.35 | length 788.6
  Top Layer w8: J9.8 775,1730 865,1640 1270,1640 1285.2,1624.8 U1.35
EXT20: J10.8 U1.34 | length 912.8
  Top Layer w8: J10.8 825,1975 825,1900 795,1870 795,1755 895,1655 1285,1655 1304.9,1635.1 U1.34
EXT21: J11.8 U1.33 | length 984.4
  Top Layer w8: v2(835,1850) 835,1760 925,1670 1295,1670 1324.6,1640.4 U1.33
  Bottom Layer w8: J11.8 825,2075 825,1860 v2(835,1850)
EXT22: J9.9 U1.32 | length 745.3
  Top Layer w8: J9.9 875,1760 950,1685 1310,1685 1344.3,1650.7 U1.32
EXT23: J10.9 U1.30 | length 880.6
  Top Layer w8: J10.9 925,1975 925,1900 895,1870 895,1780 975,1700 1325,1700 1383.7,1641.3 U1.30
EXT24: J11.9 U1.29 | length 958
  Top Layer w8: v2(935,1850) 935,1780 1000,1715 1340,1715 1403.4,1651.6 U1.29
  Bottom Layer w8: J11.9 925,2075 925,1860 v2(935,1850)
EXT25: J9.10 U1.27 | length 727.1
  Top Layer w8: J9.10 975,1780 1025,1730 1355,1730 1442.8,1642.2 U1.27
EXT26: J10.10 U1.26 | length 854.2
  Top Layer w8: J10.10 1025,1975 1025,1900 995,1870 995,1800 1050,1745 1370,1745 1462.5,1652.5 U1.26
EXT27: J11.10 U1.24 | length 939.8
  Top Layer w8: v2(1035,1850) 1035,1800 1075,1760 1385,1760 1501.9,1643.1 U1.24
  Bottom Layer w8: J11.10 1025,2075 1025,1860 v2(1035,1850)
EXT28: J9.11 U1.23 | length 700.7
  Top Layer w8: J9.11 1075,1800 1100,1775 1400,1775 1521.6,1653.4 U1.23
EXT29: J10.11 U1.22 | length 830.8
  Top Layer w8: J10.11 1125,1975 1125,1905 1095,1875 1095,1815 1120,1790 1415,1790 1541.3,1663.7 U1.22
EXT30: J11.11 U1.21 | length 902.4
  Top Layer w8: v2(1135,1850) 1135,1825 1155,1805 1430,1805 1561,1674 U1.21
  Bottom Layer w8: J11.11 1125,2075 1125,1860 v2(1135,1850)
EXT31: J9.12 U1.17 | length 690.7
  Top Layer w8: J9.12 1175,1835 1190,1820 1460,1820 1639.8,1640.2 U1.17
EXT32: J11.12 U1.16 | length 886.6
  Top Layer w8: v2(1215,1855) 1235,1835 1470,1835 1659.5,1645.5 U1.16
  Bottom Layer w8: J11.12 1225,2075 1225,1865 v2(1215,1855)
EXT33: J10.12 U1.15 | length 768.9
  Top Layer w8: J10.12 1225,1975 1225,1900 1270,1855 1475,1855 1679.2,1650.8 U1.15
EXT34: J9.13 U1.14 | length 606.4
  Top Layer w8: J9.13 1325,1875 1480,1875 1698.9,1656.1 U1.14
EXT35: J10.13 U1.12 | length 678.8
  Top Layer w8: J10.13 1325,1975 1405,1975 1738.3,1641.7 U1.12
EXT36: J11.13 U1.11 | length 786.9
  Top Layer w8: J11.13 1325,2075 1405,2075 1450,2030 1450,1960 1758,1652 U1.11
FLASH_CS: U1.38 U2.1 | length 540.2
  Top Layer w8: v2(925,1475) U1.38@1175.2,1475
  Bottom Layer w8: U2.1 v2(925,1475)
FLASH_MISO: U1.65 U2.2 | length 408.9
  Top Layer w8: v2(1000,975) 1031.6,943.4 U1.65
  Bottom Layer w8: U2.2 975,1035 1000,1010 v2(1000,975)
FLASH_MOSI: U1.64 U2.5 | length 201.6
  Top Layer w8: v2(1060,975) 1071.9,963.1 U1.64
  Bottom Layer w8: v2(1060,975) 1075,960 U2.5
FLASH_SCK: U1.70 U2.6 | length 233.7
  Top Layer w8: v2(1025,825) 1044.9,844.9 U1.70
  Bottom Layer w8: v2(1025,825) U2.6
G: C7.1 J8.8 R2.1 R13.2 R16.2 R19.2 | length 1144
  Top Layer w8: C7.1@1176,419 R19.2 R16.2 R13.2 1231,105 1305,105 v2(1350,150)
  Bottom Layer w8: v2(1350,150) 1680,150 1705,175 1705,260 J8.8 ; J8.8@1755,315 R2.1
G0: R19.1 U1.82 | length 528.1
  Top Layer w8: R19.1 1340,310 1442.8,412.8 U1.82
G1: R16.1 U1.83 | length 582
  Top Layer w8: R16.1 1290,235 1462.5,407.5 U1.83
G2: R13.1 U1.84 | length 665.1
  Top Layer w8: R13.1 1290,160 1310,180 1310,225 1482.2,397.2 U1.84
GND: C1.2 C2.1 C3.1 C4.1 C9.2 C10.2 C11.2 C12.2 C14.2 C15.2 C18.2 C19.2 C20.2 C21.2 C22.2 C23.2 C24.2 C25.2 C26.2 C27.2 C28.2 C29.2 C30.2 C31.2 C32.2 C33.2 C34.2 C35.2 C36.2 D1.1 D2.2 D3.2 D4.2 D5.2 J1.5 J2.3 J2.6 J3.2 J4.1 J5.1 J6.8 J7.3 J7.M1 J7.M2 J7.M3 J8.5 J9.14 J10.1 J10.14 J11.14 J12.2 Q1.3 R1.2 R2.2 R3.2 R29.2 U1.3 U1.13 U1.25 U1.49 U1.54 U1.60 U1.68 U1.73 U1.77 U1.91 U1.96 U1.108 U1.113 U1.130 U1.136 U1.144 U2.4 U3.8 U3.12 U3.34 U3.37 U4.2 U4.12 U4.13 U5.2 U6.1 U8.1 | length 1905.1
  Top Layer w8: v1(1100,1175) 1114.9,1160.1 U1.54 ; U1.68 1235.3,884.3 v1(1255,904) ; U1.60 1253.1,1041.9 v1(1255,1040) ; U1.49 1237.6,1258.6 v1(1255,1276) ; v1(1254,795) 1265.5,783.5 U1.73 ; U1.77 1344.3,779.3 1360,795 v1(1444,795) ; v1(1481,1500) 1482.2,1501.2 U1.25 ; U1.91 1620.1,775.1 1640,795 1700,795 1718.6,776.4 U1.96 ; v1(1716,1500) 1718.6,1502.6 U1.13 ; U1.3 1915.6,1520.4 v1(1936,1500) v1@1941,1495 ; U1.108 1955,700 v2(1985,700) ; v1(1965,1236) 1981.8,1219.2 U1.130 ; v1(1965,1355) 1982.6,1337.4 U1.136 ; v1@1965.7,884.3 U1.113 ; U1.144 U1.144@2065,1495
  Top Layer w10: U4.13 U4.12 704,410 v1(720,394)
  Top Layer w12: U6.1 160,626 v1(166,620) ; J1.5 J12.2@338.82,248.82 ; U4.2 1076,260 v1(1090,246) ; U1.144 v1(2045,1510)
  other v1: 424,620 1670,795 1965,885 869,965 1410,1090 1410,1185
  other v2: 3184,2040 3184,2125
JOY2: J6.4 U1.7 | length 1297.8
  Top Layer w8: U1.7 1836.8,1641.8 1881,1686 1901,1686 1920,1705 2125,1705 2220,1610 2810,1610 J6.4
JOY3: J6.3 U1.6 | length 1344
  Top Layer w8: U1.6 1856.5,1636.5 1887,1667 1906,1667 1924,1685 2100,1685 2197,1588 2792,1588 2900,1480 2900,1411 J6.3
JOY4: J6.2 U1.5 | length 1397.5
  Top Layer w8: U1.5 1876.2,1631.2 1894,1649 1913,1649 1929,1665 2090,1665 2190,1565 2785,1565 2875,1475 2875,1327 J6.2
  Bottom Layer w8: J6.2@2953,1273 J6.2@2953,1274.5
JOY5: J6.9 U1.39 | length 2927
  Top Layer w8: U1.39 1299.4,1455.6 1400,1355 1650,1355 1725,1430 1935,1430 1980,1475 1980,1510 2020,1550 2095,1550 2145,1500 2755,1500 2800,1455 2800,1175 2905,1070 3110,1070 3130,1090 3130,1456.5 J6.9
JOY6: J6.1 U1.1 | length 1297.7
  Top Layer w8: U1.1 2100,1585 2160,1525 2765,1525 2825,1465 2825,1268 J6.1
JOY7: J6.6 U1.2 | length 1483.8
  Top Layer w8: U1.2 1935.3,1635 1944.3,1644 2077,1644 2176,1545 2775,1545 2850,1470 2850,1275 2930.5,1194.5 J6.6
L-OUT: C3.2 J4.2 J4.3 J8.14 R22.2 | length 3562.3
  Top Layer w8: J8.14 2124,241 2614,241 2697,158 3093,158 3145,210 3230,210 3320,300 3320,1515 3110,1725 2892,1725 J4.2 J4.2@2774.88,1842.17
  Bottom Layer w8: C3.2 R22.2 2676.42,1743.5 J4.3 J4.2@2774.83,1842.17
LED: R6.1 U1.10 | length 1679.6
  Top Layer w8: U1.10 1777.7,1737.3 1725,1790 1725,1870 1767,1912 2038,1912 2109,1983 2258.57,1983 2289,1952.57 2824.48,1952.57 2849.48,1977.57 2849.48,2050 ; 2850,2050 R6.1
LEFT: R22.1 U1.8 | length 986.8
  Top Layer w8: U1.8 1817.1,1652.1 1870,1705 1894,1705 1919,1730 2130,1730 2202.43,1657.57 v1(2674.48,1657.57)
NetC1_1: C1.1 U4.3 Y1.1 Y2.1 | length 614.4
  Top Layer w8: Y2.1@650,100 Y1.1 825,235 900,310 U4.3 1070,310 v1(1090,330)
NetC2_2: C2.2 C5.2 D1.2 R28.1 | length 266.8
  Bottom Layer w8: R28.1 2426,465 2426,544 C2.2 2426,546 D1.2@2426,640
NetC5_1: C5.1 R11.2 | length 158.6
  Bottom Layer w8: C5.1 2525,465 2594,534 R11.2
NetC6_2: C6.2 U4.8 | length 124
  Top Layer w8: U4.8 C6.2
NetC7_2: C7.2 U4.7 | length 189.1
  Top Layer w8: U4.7 1141,510 C7.2
NetC8_2: C8.2 U4.6 | length 100.4
  Top Layer w8: U4.6 1099,460 C8.2
NetC13_1: C13.1 U4.10 | length 3507.8
  Top Layer w8: v2(500,600) 500,575 565,510 U4.10 ; v2(1500,2125) 1594,2031 1719,2031 1796,2108 1905,2108 1981,2032 2146,2032 2185,2071 C13.1
  Bottom Layer w8: v2(500,600) 500,650 450,700 450,1750 500,1800 1370,1800 1450,1880 1450,2075 v2(1500,2125)
NetC13_2: C13.2 R4.1 | length 140
  Bottom Layer w8: R4.1 v1@2185,1850
  other v1: 2184,1850
NetC15_1: C15.1 L1.1 U6.2 U6.4 | length 202.6
  Top Layer w12: L1.1 210,994 U6.4 ; C15.1 U6.2
NetC19_1: C19.1 L2.1 U8.2 U8.4 | length 183.3
  Bottom Layer w12: L2.1 1555,1610 1575,1630 C19.1 U8.2
NetD2_1: D2.1 R32.2 Y1.2 | length 184
  Bottom Layer w8: R32.2@916,100 1000,100 D2.1
NetD3_1: D3.1 R33.1 Y2.2 | length 826.8
  Top Layer w8: v2(725,175) 775,225 v1(775,575)
  Bottom Layer w8: D3.1 Y2.2 500,175 v2(725,175)
NetD4_1: D4.1 R6.2 | length 91
  Top Layer w8: R6.2 D4.1
NetD5_1: D5.1 R7.2 | length 91
  Top Layer w8: R7.2 D5.1
NetJ1_1: J1.1 J12.1 J13.2 | length 290.9
  Top Layer w12: J1.1 338.82,351.18 J12.1@340,352.37 ; J12.1 425,350 J13.2
NetJ3_1: J3.1 R4.2 | length 112.7
  Bottom Layer w8: J3.1@1848.52,1849.38 1849.13,1850 R4.2
NetJ5_4: J5.4 J5.5 R11.1 R29.1 | length 293.4
  Bottom Layer w8: J5.4 J5.5 ; R11.1 2596.83,436.83 J5.5 ; R29.1@2698.17,361.83 J5.5
NetJ6_7: J6.7 R5.1 | length 88.5
  Bottom Layer w8: J6.7@3066.5,1305 R5.1
NetJ7_1: J7.1 R8.1 | length 240.5
  Top Layer w8: R8.1 J7.1@3050.52,425
NetJ7_2: J7.2 R31.1 | length 238.5
  Top Layer w8: R31.1 J7.2@3048.52,325
NetJ7_5: J7.5 R9.1 | length 141.5
  Top Layer w8: R9.1 J7.5@2951.55,505
NetJ7_6: J7.6 R30.1 | length 139.5
  Top Layer w8: R30.1 J7.6@2949.52,245
NetJ13_1: J13.1 L3.1 | length 157.8
  Top Layer w12: L3.1 420,455 J13.1
NetQ1_2: Q1.2 R28.2 | length 81.4
  Bottom Layer w8: R28.2 2252,466 Q1.2
NetR24_1: R24.1 U1.37 | length 160
  Top Layer w8: R24.1 1085,1530 1120,1495 U1.37
PS2_CLK: R9.2 U1.98 | length 1124.8
  Top Layer w8: U1.98 1758,632 1910,480 2450,480 2475,505 R9.2
PS2_DATA: R8.2 U1.97 | length 1160
  Top Layer w8: U1.97 1738.3,626.7 1905,460 2640,460 2675,425 R8.2
PS2_PIN2: R31.2 U1.95 | length 1232.4
  Top Layer w8: U1.95 1698.9,641.1 1901,439 2612,439 R31.2
PS2_PIN6: R30.2 U1.94 | length 1307.4
  Top Layer w8: U1.94 1679.2,625.77 1706.41,598.57 1795,510.07 1925.07,380 2105,380 2152.17,332.83 2152.17,313.83 2177,289 2639,289 2688,240 R30.2@2726,240
R: C8.1 J8.10 R3.1 R14.2 R17.2 R20.2 | length 959.4
  Top Layer w8: v1(1660,416) R14.2 1749,416 J8.10
  Bottom Layer w8: v1(1100,405) 1120,425 1410,425 1419,416 v1(1660,416) ; J8.10@1855,315 R3.1
  other v1: 1565,415
R0: R20.1 U1.88 | length 214.5
  Top Layer w8: R20.1@1561,501 U1.88
R1: R17.1 U1.92 | length 224.2
  Top Layer w8: U1.92 1639.8,600.2 1659.5,580.5 1659.5,500 R17.1
R2: R14.1 U1.93 | length 246.8
  Top Layer w8: U1.93 1659.5,610.5 1679.2,590.8 1735,535 R14.1
R-OUT: C4.2 J4.4 J4.5 J8.12 R21.2 | length 3927.9
  Top Layer w8: J8.12 2005,360 2085,360 2125,320 2125,305 2165,265 2624,265 2704,185 3085,185 3130,230 3215,230 3300,315 3300,1500 3100,1700 2877.05,1700 2809.48,1767.57 2554.48,1767.57 2479.88,1842.17 J4.4
  Bottom Layer w8: J4.5 J4.4 2478.48,1841.07 R21.2 2558.48,1742.57 C4.2
RIGHT: R21.1 U1.9 | length 718
  Top Layer w8: U1.9 1797.4,1662.4 1861,1726 1889,1726 1918,1755 2142.13,1755 2154.57,1742.57 v1(2394.48,1742.57)
SD_CS: J2.1 U1.59 | length 790.4
  Top Layer w8: v2(835,1170) 985,1170 1093.4,1061.6 U1.59
  Bottom Layer w8: J2.1 748.77,1491.23 825,1415 835,1405 v2(835,1170)
SD_MISO: J2.7 R34.1 U1.78 | length 1167.1
  Top Layer w8: R34.1 755,890 785,860 v2(785,790) 785,700 835,650 1015,650 1065,600 1315,600 1364,649 U1.78
  Bottom Layer w8: J2.7 741.17,903.83 760,885 760,815 v2(785,790) v2@785,775
SD_MOSI: J2.2 U1.74 | length 1261.6
  Top Layer w8: v2(875,750) 925,700 1035,700 1095,640 1260,640 1285.2,665.2 U1.74
  Bottom Layer w8: J2.2 752,1392.8 800,1345 800,850 875,775 v2(875,750)
SD_SCK: J2.5 U1.75 | length 1049.7
  Top Layer w8: v2(825,725) 875,675 1025,675 1080,620 1269.8,620 1304.9,655.1 U1.75
  Bottom Layer w8: J2.5 747.47,1097.53 780,1065 780,840 825,795 v2(825,725)
STDN: R32.1 U1.67 U4.1 | length 1003.9
  Top Layer w8: v1@915,185 v1(925,185) 950,210 U4.1 ; v2(975,750) 975,850 1029,904 U1.67
  Bottom Layer w8: v1(925,185) 975,235 v2(975,750)
STDNB: R33.2 U1.66 | length 574.6
  Top Layer w8: v2(925,800) 925,835 1013.7,923.7 U1.66
  Bottom Layer w8: R33.2 925,641 v2(925,800)
TCK: J8.7 U1.109 | length 1093.8
  Top Layer w8: U1.109 2079.5,805.5 2100,785 2100,775 v2(2135,740)
  Bottom Layer w8: J8.7 1807,158 2085,158 2120,193 2120,415 2100,435 2100,620 2135,655 v2(2135,740)
TDI: J8.11 U1.110 | length 764.9
  Top Layer w8: U1.110 2109.8,825.2 v2(2130,805)
  Bottom Layer w8: J8.11 2005,260 2005,345 2050,390 2050,725 v2(2130,805) ; v2@2125,810 v2@2125,814
TDO: J8.9 U1.106 | length 855.5
  Top Layer w8: U1.106 v2@1915.6,799.4
  Bottom Layer w8: J8.9 1905,260 1905,325 1940,360 1990,360 2030,400 2030,740 1970,800 v2(1915,800)
TMS: J8.13 U1.107 | length 766.9
  Top Layer w8: U1.107 1935.3,764.7 1950.6,780 2000,780 v2(2095,685)
  Bottom Layer w8: J8.13 2100,255 2100,366 2075,391 2075,665 v2(2095,685)
VSYNC: J8.2 U1.85 | length 424.9
  Top Layer w8: J8.2 1501.9,356.9 U1.85
WR: U1.118 U3.15 | length 644.9
  Top Layer w8: U1.118 2157.8,982.8 2181,1006 2300,1006 2326,980 v3(2590,980)
  Bottom Layer w8: v3(2590,980) 2590.24,979.76 U3.15
XA0: U1.143 U3.3 | length 673.1
  Top Layer w8: U1.143 2334.7,1475.3 2452,1358 v3(2620,1358)
  Bottom Layer w8: v3(2620,1358) 2620.28,1357.72 U3.3
XA1: U1.142 U3.4 | length 678.2
  Top Layer w8: U1.142 2326.4,1455.6 2456,1326 v3(2590,1326)
  Bottom Layer w8: v3(2590,1326) 2590.22,1326.22 U3.4
XA2: U1.141 U3.5 | length 682.9
  Top Layer w8: U1.141 2318.1,1435.9 2459,1295 v3(2620,1295)
  Bottom Layer w8: v3(2620,1295) 2620.28,1294.72 U3.5
XA3: U1.140 U3.6 | length 688
  Top Layer w8: U1.140 2310.8,1416.2 2464,1263 v3(2590,1263)
  Bottom Layer w8: v3(2590,1263) 2590.23,1263.23 U3.6
XA4: U1.139 U3.7 | length 693.3
  Top Layer w8: U1.139 2303.5,1396.5 2469,1231 v3(2620,1231)
  Bottom Layer w8: v3(2620,1231) 2620.73,1231.73 U3.7
XA5: U1.104 U3.16 | length 1086.8
  Top Layer w8: U1.104 1876.2,658.8 1955,580 2286,580 2500,794 2500,874 2574,948 v3(2620,948)
  Bottom Layer w8: v3@2625,948 v3(2620,948) U3.16
XA6: U1.102 U3.17 | length 1127.4
  Top Layer w8: U1.102 1836.8,668.2 1945,560 2310,560 2520,770 2520,862 2576,918 v3(2590,918)
  Bottom Layer w8: v3(2590,918) 2591.23,916.77 U3.17
XA7: U1.101 U3.18 | length 1160.9
  Top Layer w8: U1.101 1817.1,657.9 1935,540 2329,540 2540,751 2540,851 2575,886 v3(2620,886)
  Bottom Layer w8: v3(2620,886) 2620.72,885.28 U3.18
XA8: U1.100 U3.19 | length 1187.4
  Top Layer w8: U1.100 1797.4,647.6 1925,520 2352,520 2560,728 2560,824 v3(2590,854)
  Bottom Layer w8: v3(2590,854) 2590.22,853.78 U3.19
XA9: U1.99 U3.20 | length 1208.9
  Top Layer w8: U1.99 1777.7,637.3 1915,500 2379,500 2580,701 2580,783 v3(2620,823)
  Bottom Layer w8: v3(2620,823) 2620.72,822.28 U3.20
XA10: U1.112 U3.26 | length 288.5
  Top Layer w8: U1.112 2155.4,864.6 2166.22,853.78 v3(2274.78,853.78)
  Bottom Layer w8: U3.26 v3(2274.78,853.78)
XA11: U1.114 U3.27 | length 352.8
  Top Layer w8: U1.114 2162,904 2181.45,884.55 v3(2305,884.55)
  Bottom Layer w8: U3.27 2304.28,885.28 v3(2305,884.55)
XA12: U1.115 U3.28 | length 286
  Top Layer w8: U1.115 2194.3,923.7 2201,917 v3(2275,917)
  Bottom Layer w8: U3.28 v3@2273.77,916.77
XA13: U1.116 U3.29 | length 347
  Top Layer w8: U1.116 2173.4,943.4 2179,949 v3(2305,949)
  Bottom Layer w8: U3.29 2304.27,948.27 v3(2305,949)
XA14: U1.117 U3.30 | length 292.3
  Top Layer w8: U1.117 2163.1,963.1 2181,981 v3(2275,981)
  Bottom Layer w8: U3.30 2273.76,979.76 v3(2275,981)
XA15: U1.131 U3.38 | length 361.2
  Top Layer w8: U1.131 2123.1,1238.9 2147,1215 v3(2305,1215)
  Bottom Layer w8: U3.38 2288.27,1231.73 v3(2305,1215)
XA16: U1.133 U3.39 | length 443.9
  Top Layer w8: U1.133 2144.7,1278.3 2161,1262 v3(2352,1262)
  Bottom Layer w8: U3.39 v3@2350.77,1263.23
XA17: U1.134 U3.40 | length 286.4
  Top Layer w8: U1.134 2156,1298 2160,1294 v3(2275,1294)
  Bottom Layer w8: U3.40 2274.28,1294.72 v3(2275,1294)
XA18: U1.137 U3.41 | length 357.4
  Top Layer w8: U1.137 2122.9,1357.1 2154,1326 v3(2305,1326)
  Bottom Layer w8: U3.41 2304.78,1326.22 v3(2305,1326)
XA19: U1.111 U3.25 | length 354
  Top Layer w8: U1.111 2145.1,844.9 2165.71,824.29 2168,822 v3(2305,822)
  Bottom Layer w8: U3.25 2304.72,822.28 v3(2305,822)
XA20: U1.138 U3.42 | length 292.3
  Top Layer w8: U1.138 2138.2,1376.8 2157,1358 v3(2275,1358)
  Bottom Layer w8: U3.42 2274.72,1357.72 v3(2275,1358)
XD0: U1.132 U3.9 | length 662.2
  Top Layer w8: U1.132 2134.4,1258.6 2153,1240 2328,1240 2400,1168 v3(2590,1168)
  Bottom Layer w8: v3(2590,1168) 2590.74,1168.74 U3.9
XD1: U1.126 U3.10 | length 625.9
  Top Layer w8: U1.126 2145.4,1140.4 2148.8,1137 v3(2620,1137)
  Bottom Layer w8: v3@2620.24,1137.24 U3.10
  Bottom Layer w10: v3(2620,1137) v3@2620.24,1137.24
XD2: U1.123 U3.13 | length 641
  Top Layer w8: U1.123 2400.7,1081.3 2440,1042 v3(2590,1042)
  Bottom Layer w8: v3(2590,1042) 2590.76,1042.76 U3.13
XD3: U1.120 U3.14 | length 642.9
  Top Layer w8: U1.120 2137.2,1022.2 2154,1039 2348,1039 2375,1012 v3(2620,1012)
  Bottom Layer w8: v3(2620,1012) 2620.74,1011.26 U3.14
XD4: U1.119 U3.31 | length 436.2
  Top Layer w8: U1.119 2147.5,1002.5 2167,1022 ; 2162.98,1017.98 2167,1022 ; v3(2340,1007) 2325,1022 2167,1022
  Bottom Layer w8: U3.31 2335.74,1011.26 v3(2340,1007)
XD5: U1.121 U3.32 | length 522.4
  Top Layer w8: U1.121 2131.9,1041.9 2144,1054 2374,1054 v3(2388,1040)
  Bottom Layer w8: U3.32 2385.24,1042.76 v3(2388,1040)
XD6: U1.124 U3.35 | length 359.4
  Top Layer w8: U1.124 2136,1101 2146,1111 v3(2305,1111)
  Bottom Layer w8: U3.35 2278.76,1137.24 v3(2305,1111)
XD7: U1.127 U3.36 | length 348
  Top Layer w8: U1.127 2273,1160.1 2274.9,1162 v3(2305,1162)
  Bottom Layer w8: U3.36 2298.26,1168.74 v3(2305,1162)
pads on no net: J1.2 J1.3 J1.4 J1.6 J1.7 J1.8 J1.9 J1.10 J1.11 J2.8 J2.9 J2.10 J2.11 J2.M1 J2.M2 J2.P1 J2.P2 J2.P3 J2.P4 J3.0 J4.6 J4.7 J4.8 J4.9 J4.10 J5.2 J5.3 J5.6 J5.7 J5.8 J5.9 J5.10 J6.5 J6.Hole49 J6.Hole50 J8.1 U1.71 U1.72 U3.1 U3.2 U3.21 U3.22 U3.23 U3.24 U3.43 U3.44 U4.9 U4.11 U5.1

## Polygon pours and split planes (outlines as drawn)
GND on Bottom Layer "543" (hatched Horizontal grid 8 track 8, pour order 0): 3360,26.97 25,26.97 25,2176.97 3360,2176.97

## Keep-outs
Keep-Out Layer:
  lines w10: 0,0 3385.53,0 3385.53,2204.53 0,2204.53 0,0

## Silkscreen, mask and mechanical layers (free items; w line width, h text height)
Top Overlay:
  lines w10: 0,0 3385.53,0 3385.53,2204.53 0,2204.53 0,0
  text "Hark0" at 120,1725 h30 r270
  text "mcleod_ideafix" at 165,1725 h30 r270
  text "antoniovillena" at 210,1725 h30 r270
  text "superfo" at 253.2,1725 h30 r270
Bottom Overlay:
  text "1" at 1705,960 h30
Mechanical 1:
  lines w10: 0,0 0,2204.53 3385.53,2204.53 3385.53,0 0,0

## Text inside footprints (layer, text, board x,y; h text height)
J2: Mechanical 2 "CON7" at 998.7,725.12 h67.5 r270
J6: Top Overlay "9" at 3095.63,1594.12 h37.5 r90; Top Overlay "6" at 3095.63,1094.12 h37.5 r90; Top Overlay "5" at 2970.63,1644.12 h37.5 r90; Top Overlay "1" at 2970.63,1044.12 h37.5 r90; Top Overlay "PLUG" at 3249.63,827.45 h37.5 r90; Mechanical 1 "9" at 3095.63,1594.12 h37.5 r90; Mechanical 1 "6" at 3095.63,1094.12 h37.5 r90; Mechanical 1 "5" at 2970.63,1644.12 h37.5 r90; Mechanical 1 "1" at 2970.63,1044.12 h37.5 r90; Mechanical 1 "PLUG" at 3249.63,827.45 h37.5 r90
J7: Top Overlay "4" at 3092.42,251.37 h37.5 r270; Top Overlay "6" at 2920,185 h37.5 r270; Top Overlay "5" at 2919.9,586.37 h37.5 r270; Top Overlay "3" at 3092.42,526.37 h37.5 r270; Top Overlay "1" at 3092.42,438.87 h37.5 r270; Top Overlay "2" at 3092.42,338.87 h37.5 r270; Mechanical 1 "4" at 3092.42,251.37 h37.5 r270; Mechanical 1 "6" at 2804.9,251.37 h37.5 r270; Mechanical 1 "5" at 2804.9,526.37 h37.5 r270; Mechanical 1 "3" at 3092.42,526.37 h37.5 r270; Mechanical 1 "1" at 3092.42,438.87 h37.5 r270; Mechanical 1 "2" at 3092.42,338.87 h37.5 r270
U1: Top Overlay "109" at 2143.43,821.13 h37.5 r90; Top Overlay "37" at 1065,1495 h37.5 r270; Top Overlay "1" at 1974.18,1693.42 h37.5 r180; Top Overlay "73" at 1265,605 h37.5; Mechanical 2 "QUAD.50M/144/WG22.60" at 1351.18,937.38 h22.5 r180
U6: Mechanical 2 "SM/SOT223" at 763.82,1357.62 h22.5